# Altium PCB 2019电压基准.PcbDoc
Units mil, origin at the board's own origin, x right, y up, seen from the top; angles counter-clockwise.
Board outline 2866.22 x 2383.11 mil, 2 copper layers (Top Layer, Bottom Layer); 52 components, 32 nets, 189 pads, 6 vias.
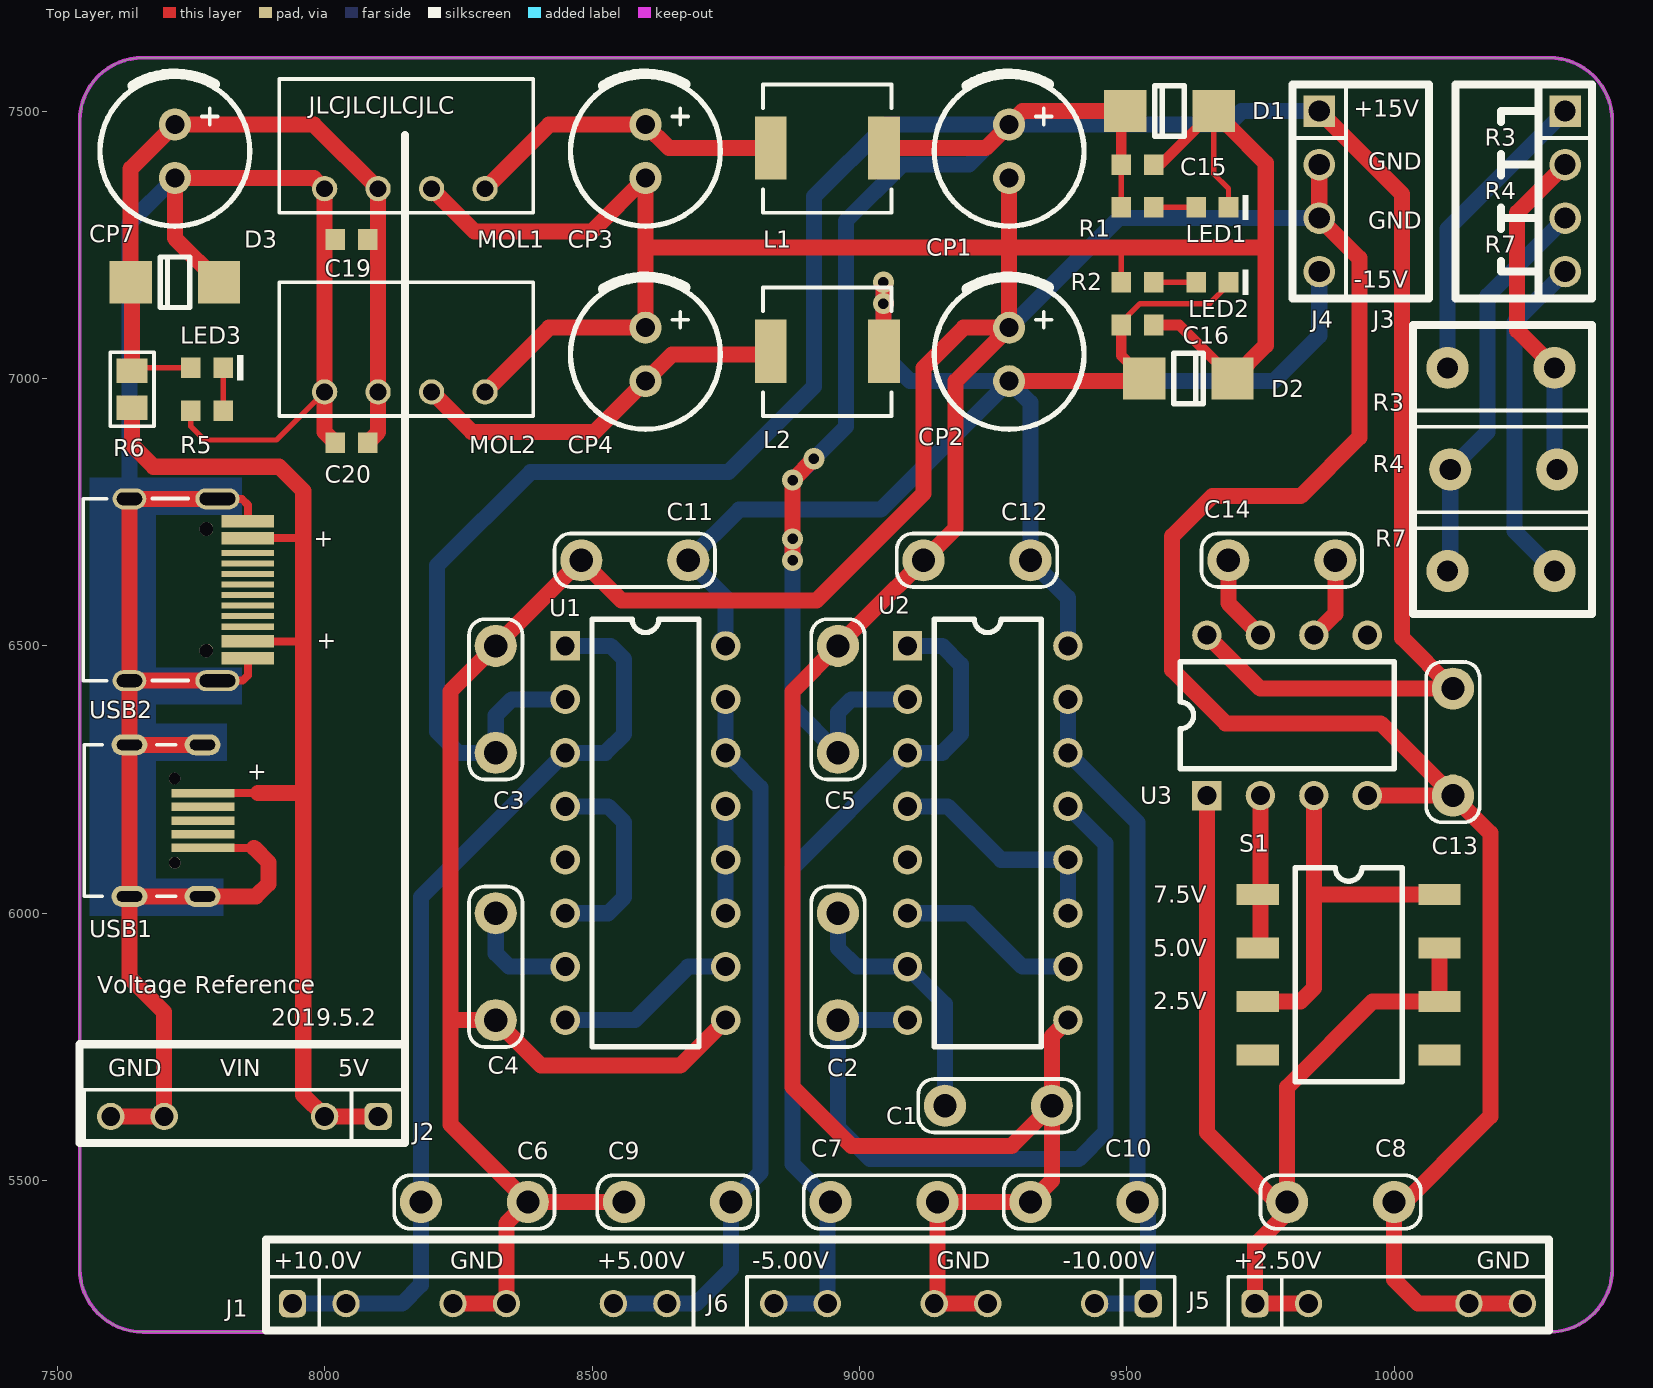
[diagram p0: Top Layer view]
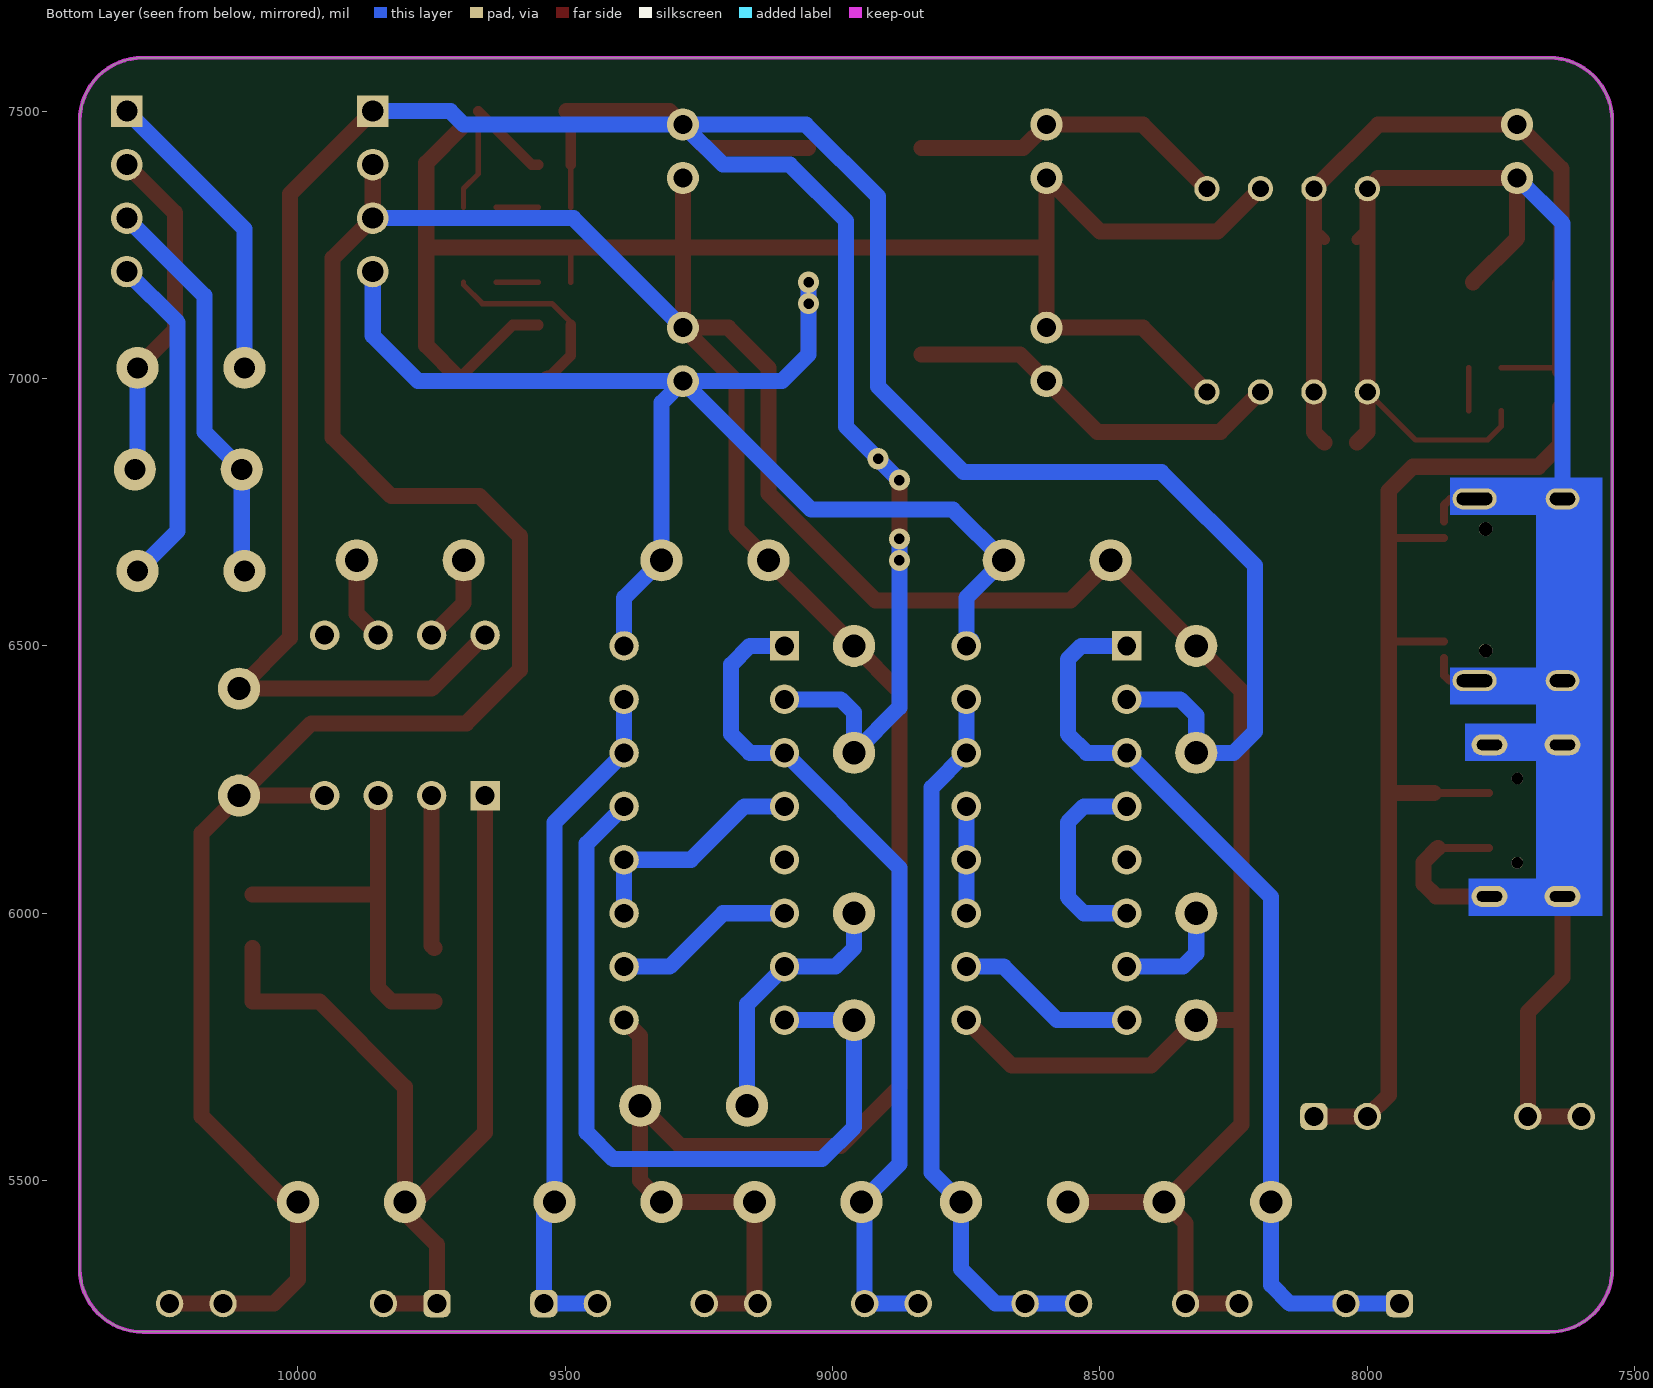
[diagram p1: Bottom Layer view, seen from below]
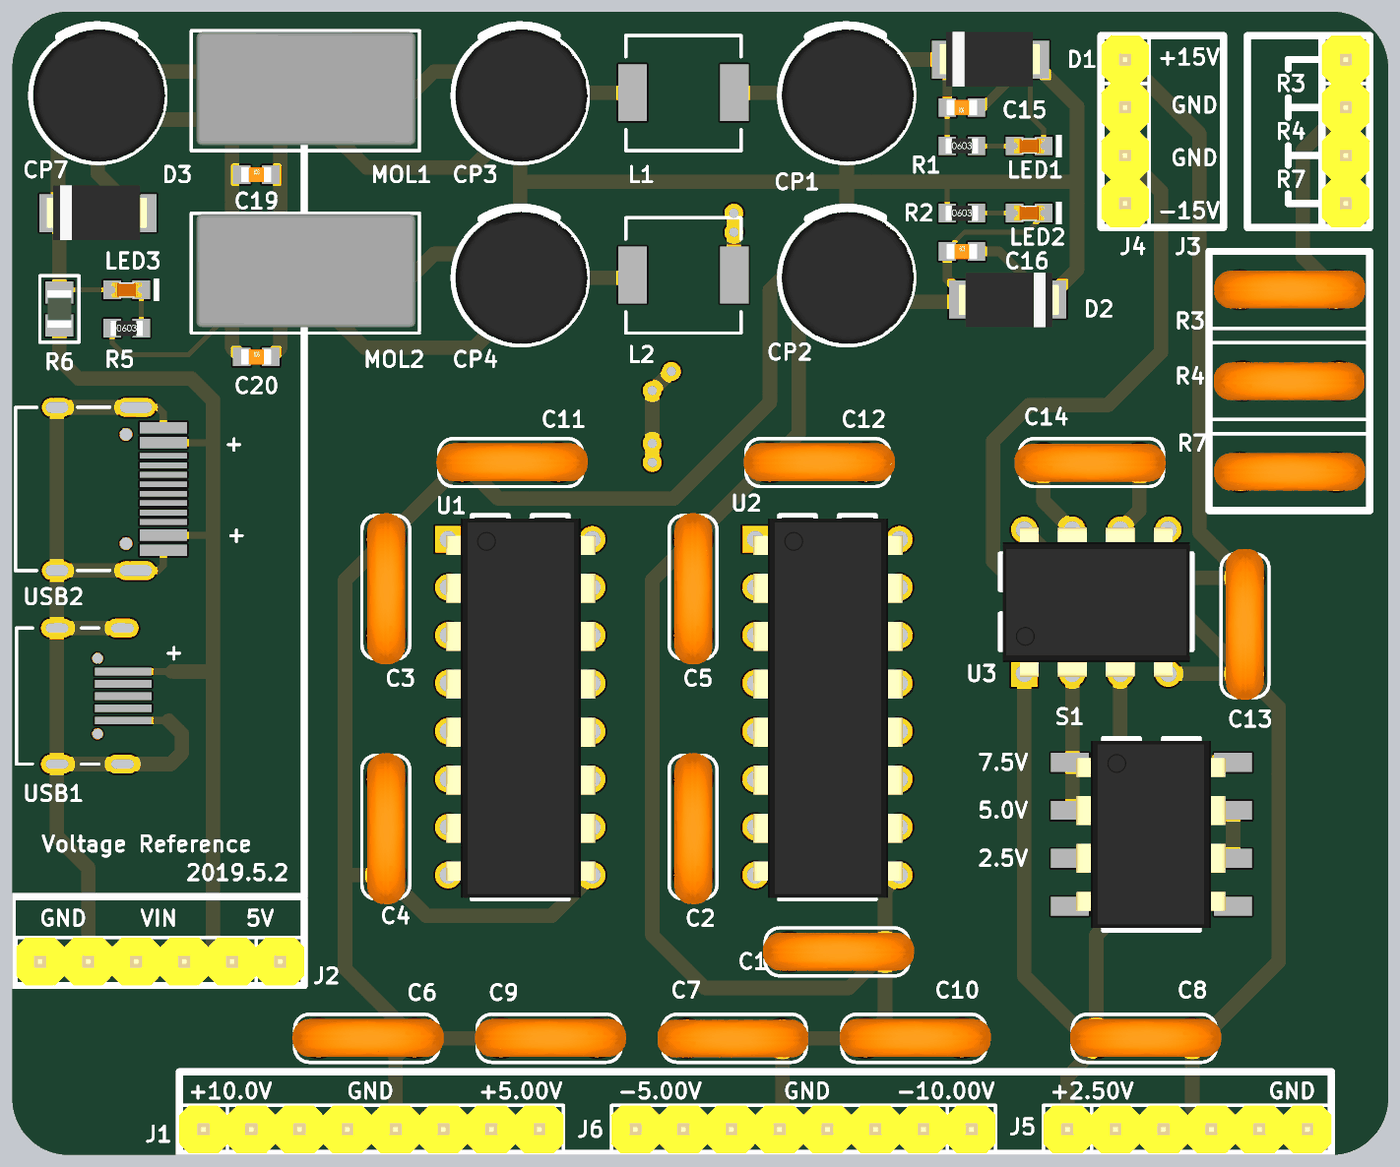
[diagram p2: 3D render of the assembled board from above, using the file's embedded part models]

## Layer stack, top to bottom
Top Layer: signal copper 1.4
Dielectric: dielectric 12.6, FR-4, Dk 4.8
Bottom Layer: signal copper 1.4

## Board outline
7541.89,5335 7541.89,7481.89 cw(c7660,7481.89) 7660,7600 10290,7600 cw(c10290,7481.89) 10408.11,7481.89 10408.11,5335 cw(c10290,5335) 10290,5216.89 7660,5216.89 cw(c7660,5335)

## Design rules (kind name [scope] priority, off if disabled: settings)
Clearance [All] p1: gap=7
ComponentClearance [All] p1 off: gap=10 collisioncheckmode=3 verticalgap=10 showdistances=FALSE
Height [All] p1 off: minheight=0 maxheight=1000 prefheight=500
HoleSize [All] p1: absolutevalues=TRUE maxlimit=196.85 minlimit=15.75 maxpercent=80.000 minpercent=20.000
MinimumSolderMaskSliver [All] p1 off: minsoldermaskwidth=10
PolygonConnect [All] p1: connectstyle=Relief reliefconductorwidth=10 reliefentries=4 polygonreliefangle="90 Angle"
RoutingVias [All] p1: holewidth=19.68 width=39.37 viastyle="Through Hole" minholewidth=19.68 minwidth=39.37 maxholewidth=19.68 maxwidth=39.37
SilkToSilkClearance [All] p1 off: silktosilkclearance=10
SilkscreenOverComponentPads [All] p1 off: minsilkscreentomaskgap=10
SolderMaskExpansion [All] p1: expansion=4
Width [All] p1: maxlimit=30 minlimit=10 preferedwidth=20
22 further rules are at their usual default settings.

## Components (designator, comment, footprint, x,y, rotation, side; value= is the part's Value field where it differs from the comment)
C1 "0.1UF" cap-3 9360,5640 r180 top
C2 "0.1UF" cap-3 8960,5800 r90 top
C3 "0.1UF" CAP-3 8320,6300 r90 top
C4 "0.1UF" CAP-3 8320,5800 r90 top
C5 "0.1UF" cap-3 8960,6300 r90 top
C6 "0.1UF" CAP-3 8380,5460 r180 top
C7 "0.1UF" CAP-3 8946,5460 r0 top
C8 "0.1UF" CAP-3 10000,5460 r180 top
C9 "0.1UF" CAP-3 8760,5460 r180 top
C10 "0.1UF" CAP-3 9520,5460 r180 top
C11 "0.1UF" CAP-3 8680,6660 r180 top
C12 "0.1UF" cap-3 9320,6660 r180 top
C13 "0.1UF" CAP-3 10110,6420 r270 top
C14 "0.1UF" cap-3 9690,6660 r0 top
C15 "0.1UF" LC-0603-C 9520,7400 r180 top
C16 "0.1UF" LC-0603-C 9520,7100 r0 top
C19 "0.1UF" LC-0603-C 8050,7260 r0 top
C20 "0.1UF" LC-0603-C 8050,6880 r0 top
CP1 "100UF/25V" cap 9280,7500 r270 top
CP2 "100UF/25V" cap 9280,7120 r270 top
CP3 "100UF/25V" cap 8600,7500 r270 top
CP4 "100UF/25V" cap 8600,7120 r270 top
CP7 "220UF/10V" cap 7720,7500 r270 top
D1 "16CA" LC-SMA(DO-214AC)_S3 9580,7500 r0 top
D2 "16CA" LC-SMA(DO-214AC)_S3 9615.43,7000 r180 top
D3 "6.8CA" LC-SMA(DO-214AC)_S3 7720,7180 r0 top
J1 "CON8" sip-8 7940,5270 r0 top
J2 "CON6" sip-6 8100,5620 r180 top
J3 "CON4" sip-4 10320,7500 r270 top
J4 "CON4" sip-4 9860,7500 r270 top
J5 "CON6" sip-6 9740,5270 r0 top
J6 "CON8" sip-8 9540,5270 r180 top
L1 "33UH" lin6*6 9060,7306 r180 top
L2 "33UH" lin6*6 9060,6926 r180 top
LED1 "LED" lc-0603_LED_S5 9660,7320 r180 top
LED2 "LED" lc-0603_LED_S5 9660,7180 r180 top
LED3 "LED" lc-0603_LED_S5 7780,7020 r180 top
MOL1 "B0505S" B0505S 8390,7560 r180 top
MOL2 "B0505S" B0505S 8390,7180 r180 top
R1 "10K" LC-0603-R 9520,7320 r0 top
R2 "10K" LC-0603-R 9520,7180 r0 top
R3 "10K" fuse4 10300,7020 r180 top
R4 "10K" fuse4 10105,6830 r0 top
R5 "2K" LC-0603-R 7780,6940 r0 top
R6 "0R" LC-0805_L 7640,6980 r90 top
R7 "10K" fuse4 10300,6640 r180 top
S1 "SW DIP-4" stc-dip8-smd 9765,6035 r0 top
U1 "AD588" stc-dip16 8450,6500 r0 top locked
U2 "AD588" stc-dip16 9090,6500 r0 top locked
U3 "AD584" stc-dip8 9650,6220 r90 top
USB1 "USB-Micro-A" USB-MICRO-R 7635,6315 r270 top locked
USB2 "USB-Type-C-A" USB-Type-C-R 7635,6775 r270 top locked

## Footprints (in the part's own frame and the unit in brackets; to place one, negate y for a bottom-side part, rotate by r counter-clockwise, add the part's x,y. Pads: shape width x height; smd on the part's side, far side on the other; paste and mask are expansions set on the pad)
B0505S [mm]
  round 1.2 hole 0.8: 1(9.906,5.207) 2(7.366,5.207) 3(4.826,5.207) 4(2.286,5.207)
  silkscreen extent 0,0 12.06,6.35, body extent 0.2,0.05 11.8,6.05, height 10.5
cap [mil]
  round 60 hole 35.43: 1(25,0) 2(125,0)
  silkscreen extent -70,-140 215,140, body extent -63,-135 213,141, height 531
cap-3 [mm]
  round 2 hole 1.1: 1(0,0) 2(5.08,0)
  silkscreen extent -1.27,-1.27 6.35,1.27, body extent -1.52,-1.02 6.45,0.98, height 11.46
CAP-3 [mm]
  round 2 hole 1.1: 1(0,0) 2(5.08,0)
  silkscreen extent -1.27,-1.27 6.35,1.27, body extent -1.52,-1.02 6.45,0.98, height 11.46
fuse4 [mm]
  round 2 hole 1: 1(0,0) 2(5.08,0)
  silkscreen extent -1.78,-2.03 6.73,2.03, body extent -1.52,-1.02 6.45,0.98, height 11.46
LC-0603-C [mm]
  rect 0.93x0.98 smd: 1(-0.77,0) 2(0.77,0)
  body extent -0.8,-0.4 0.8,0.4, height 0.3
LC-0603-R [mm]
  rect 0.93x0.98 smd: 1(-0.77,0) 2(0.77,0)
  body extent -0.85,-0.4 0.85,0.4, height 0.56
lc-0603_LED_S5 [mm]
  rect 0.93x0.98 smd: A(0.77,0) K(-0.77,0)
  silkscreen extent -1.72,-0.6 -1.42,0.6, body extent -0.8,-0.4 0.8,0.4, height 0.6
LC-0805_L [mm]
  rect 1.16x1.47 smd: 1(-0.875,0) 2(0.875,0)
  silkscreen extent -1.76,-1.04 1.76,1.03, body extent -1,-0.64 1,0.64, height 0.6
LC-SMA(DO-214AC)_S3 [mm]
  rect 2x2 smd: 1(2.1,0) 2(-2.1,0)
  silkscreen extent -0.7,-1.2 0.7,1.2, body extent -2.7,-1.43 2.58,1.46, height 2.44
lin6*6 [mm]
  rect 1.5x3 smd: 1(0.356,-3.175) 2(5.74,-3.175)
  silkscreen extent 0,-6.2 6.1,-0.1
sip-4 [mm]
  rect 1.5x1.5 hole 1: 1(0,0)
  round 1.5 hole 1: 2(2.54,0) 3(5.08,0) 4(7.62,0)
  silkscreen extent -1.27,-1.27 8.89,1.27, body extent -1.27,-1.27 8.89,1.27, height 6
sip-6 [mm]
  rrect50% 1.3x1.3 hole 0.9: 1(0,0)
  round 1.3 hole 0.9: 2(2.54,0) 5(10.16,0) 6(12.7,0)
  silkscreen extent -1.27,-1.27 13.97,1.27, body extent -1.27,-1.27 13.97,1.27, height 6
sip-8 [mm]
  rrect50% 1.3x1.3 hole 0.9: 1(0,0)
  round 1.3 hole 0.9: 2(2.54,0) 4(7.62,0) 5(10.16,0) 7(15.24,0) 8(17.78,0)
  silkscreen extent -1.27,-1.27 19.05,1.27, body extent -1.27,-1.27 19.05,1.27, height 6
stc-dip8 [mm]
  rect 1.4x1.4 hole 0.9: 1(0,0)
  round 1.4 hole 0.9: 2(0,-2.54) 3(0,-5.08) 4(0,-7.62) 5(7.62,-7.62) 6(7.62,-5.08) 7(7.62,-2.54) 8(7.62,0)
  silkscreen extent 1.27,-8.89 6.35,1.27, body extent -0.18,-8.77 7.74,1.14, height 4.19
stc-dip8-smd [mm]
  rect 2x1 smd: 1(-0.508,0) 2(-0.508,-2.54) 3(-0.508,-5.08) 4(-0.508,-7.62) 5(8.128,-7.62) 6(8.128,-5.08) 7(8.128,-2.54) 8(8.128,0)
  silkscreen extent 1.27,-8.89 6.35,1.27, body extent -0.18,-8.77 7.74,1.14, height 4.19
stc-dip16 [mm]
  rect 1.4x1.4 hole 0.9: 1(0,0)
  round 1.4 hole 0.9: 2(0,-2.54) 3(0,-5.08) 4(0,-7.62) 5(0,-10.16) 6(0,-12.7) 7(0,-15.24) 8(0,-17.78) 9(7.62,-17.78) 10(7.62,-15.24) 11(7.62,-12.7) 12(7.62,-10.16) 13(7.62,-7.62) 14(7.62,-5.08) 15(7.62,-2.54) 16(7.62,0)
  silkscreen extent 1.27,-19.05 6.35,1.27, body extent -0.12,-18.98 7.8,1.09, height 4.19
USB-MICRO-R [mm]
  oval 1x1.7 hole 0.5 slot 1.2 at 90 deg: 0(0,3.47) 0(0,0) 0(7.2,0) 0(7.2,3.47)
  rect 0.4x3 smd: 1(2.3,3.5) 2(2.95,3.5) 3(3.6,3.5) 4(4.25,3.5) 5(4.9,3.5)
  round 0.55 hole 0.55: G(1.6,2.15) G(5.6,2.15)
  silkscreen extent 0,-2.15 7.2,2.2
USB-Type-C-R [mm]
  oval 1x2.1 hole 0.6 slot 1.7 at 90 deg: 0(0,4.18) 0(8.64,4.18)
  oval 1x1.6 hole 0.6 slot 1.2 at 90 deg: 0(0,0) 0(8.64,0)
  rect 0.6x2.5 smd: A1(1.07,5.625) A4(1.87,5.625) A9(6.77,5.625) A12(7.57,5.625)
  rect 0.3x2.5 smd: A5(3.07,5.625) A6(4.07,5.625) A7(4.57,5.625) A8(5.57,5.625) B5(6.07,5.625) B6(5.07,5.625) B7(3.57,5.625) B8(2.57,5.625)
  round 0.65 hole 0.65: G(1.43,3.65) G(7.21,3.65)
  silkscreen extent -0.01,-2.2 8.64,2.79

## Part data
C1 C2 C3 C4 C5 C6 C7 C8 C9 C10 C11 C12 C13 C14 C15 C16 C19 C20: library part CAP
CP1 CP2 CP3 CP4 CP7: library part CAP1
D1 D2 D3: library part DIODE
J1 J2 J3 J4 J5 J6: "Connector"
L1 L2: library part INDUCTOR
R1 R2 R3 R4 R5 R6 R7: library part RES
S1: "DIP Switch"

## Via types
v1: diameter 39.37, hole 19.68, Top Layer to Bottom Layer, 6 vias

## Nets (pads, with @x,y where several pads share a name; then routed paths per layer and width w, separated by ;. In a path a pad name is that pad's centre, name@x,y a point inside that pad or via, vN(x,y) a via of type N, cw(c..) or ccw(c..) an arc to the next point about the centre after c; other vN are vias at no path point)
+15V: C3.1 C5.1 C13.1 C15.2 CP1.1 D1.2 J4.1 L1.1 R1.1 U1.2 U2.2 U3.8 | length 7045.2
  Top Layer w10: R1.1 C15.2 ; D1.2@9489.68,7485 9489.68,7492.36 D1.2
  Top Layer w20: C15.2 D1.2@9489.68,7485
  Top Layer w30: v1(8875,6660) v1(8875,6810) v1(8915,6850) ; L1.1 9210,7431 9236,7431 CP1.1 9305,7500 D1.2 ; U3.8 9750,6420 C13.1 10015,6515 10015,7005 10015,7345 J4.1
  Bottom Layer w30: U1.2 8350,6400 8320,6370 C3.1 8250,6300 8210,6340 8210,6650 8385,6825 8755,6825 8915,6985 8915,7340 9050,7475 CP1.1 ; v1@8875,6695 8875,6620 ; v1(8875,6700) 8875,6620 ; v1(8875,6810) 8975,6910 8975,7295 9080,7400 9205,7400 CP1.1 ; U2.2 8985,6400 8960,6375 C5.1 8875,6385 8875,6620 ; J4.1 9790,7500 9715,7500 9690,7475 9320,7475 CP1.1
-15V: C11.1 C12.1 C16.1 CP2.2 D2.1 J4.4 L2.1 LED2.K U1.16 U2.16 | length 3724.7
  Top Layer w10: C16.1 9489.68,7104.69 9525,7140 9655,7140 9690.31,7175.31 LED2.K
  Top Layer w20: C16.1 9489.68,7043.07 D2.1
  Top Layer w30: v1(9045,7180) v1(9045,7140) 9045,7052 L2.1 ; CP2.2 9527.76,6995 D2.1
  Bottom Layer w30: U1.16@8740,6510 U1.16 8750,6590 C11.1 8775,6755 8985,6755 ; 8835,6755 8985,6755 ; v1(9045,7180) v1(9045,7140) 9045,7045 9095,6995 CP2.2 ; U2.16 9390,6590 C12.1 9320,6955 CP2.2 ; 9655,6995 9430,6995 ; J4.4 9860,7080 9775,6995 9430,6995 ; 8985,6755 9040,6755 CP2.2 ; CP2.2 9430,6995
AGND: C1.1 C3.2 C4.1 C5.2 C6.1 C7.2 C8.1 C9.2 C10.2 C11.2 C12.2 C13.2 C15.1 C16.2 CP1.2 CP2.1 CP3.2 CP4.1 D1.1 D2.2 J1.4 J1.5 J4.2 J4.3 J5.5 J5.6 J6.4 J6.5 LED1.K MOL1.3 MOL2.4 R2.1 U1.9 U2.9 U3.4 | length 14223.2
  Top Layer w10: R2.1 9489.68,7244.69 ; D1.1 9662.68,7382.64 9690.31,7355 LED1.K
  Top Layer w20: C16.2 9598.11,7100 D2.2 ; C15.1 9562.68,7400 D1.1
  Top Layer w30: MOL1.3 8280,7275 8500,7275 CP3.2 8600,7245 ; J1.4 J1.5 8340,5420 C6.1 ; MOL2.4 8420,7095 CP4.1 8600,7245 ; C9.2 C6.1 ; U1.9 8665,5715 8405,5715 C4.1 8235,5800 ; C7.2@9146,5440 9146,5276 J6.5 J6.4 ; C7.2 C10.2 9360,5500 C1.1 ; CP1.2 9280,7245 ; C10.2@9320,5440 C10.2@9330,5450 ; U2.9 9360,5770 C1.1 ; D1.1@9690.31,7472.36 9760,7402.68 9760,7245 ; D2.2 9760,7061.89 9760,7245 ; J4.2 J4.3 9935,7225 9935,6890 9825,6780 9660,6780 9585,6705 9585,6455 9685,6355 9975,6355 C13.2@10100,6230 ; U3.4 C13.2@10090,6220 ; C13.2@10110,6240 C13.2@10100,6230 ; J5.6 J5.5 10045,5270 10000,5315 10000,5440 10180,5620 10180,6150 C13.2 ; 8235,5800 8235,6415 C3.2 C11.2 8555,6585 8920,6585 9120,6785 9120,7020 9195,7095 CP2.1 ; 8235,5800 8235,5605 C6.1 ; 8600,7245 9280,7245 ; CP2.1 9280,7245 ; CP2.1 9180,6995 9180,6720 C5.2 8875,6415 8875,5675 8985,5565 9285,5565 C1.1 ; 9280,7245 9760,7245 ; C13.2@10090,6220 C13.2 ; C13.2@10090,6220 C13.2@10100,6230 ; C13.2@10100,6230 C13.2
  Bottom Layer w30: CP2.1 9485,7300 J4.3
GND: C19.1 C20.1 CP7.2 D3.1 J2.5 J2.6 MOL1.1 MOL2.1 R5.1 USB1.0 USB1.5 USB2.0 USB2.A1 USB2.A12 | length 4367.7
  Top Layer w10: R5.1 7749.69,6935.31 7749.69,6910.31 7775,6885 7910,6885 MOL2.1
  Top Layer w15: USB1.5 7867.91,6122.09 ; USB2.0@7799.57,6434.84 7846.3,6434.84 7856.46,6445 USB2.A12 ; USB2.0@7799.57,6775 7845,6775 7856.46,6763.54 7856.46,6750 USB2.A1
  Top Layer w20: 8000,7279.69 C19.1
  Top Layer w30: J2.6 J2.5 7700,5815 7635,5880 USB1.0@7635,6031.54 ; USB1.0@7771.61,6315 USB1.0@7635,6315 ; USB2.0@7799.57,6434.84 USB2.0@7635,6434.84 ; USB2.0@7799.57,6775 7635,6775 USB2.0@7635,6434.84 ; D3.1 7720,7262.68 CP7.2 7980,7375 MOL1.1 MOL2.1 8000,6899.69 C20.1 ; 7867.91,6122.09 7895,6095 7895,6055 7871.54,6031.54 7771.61,6031.54 USB1.0@7635,6031.54 ; USB1.0@7635,6031.54 USB1.0@7635,6315 ; USB1.0@7635,6315 USB2.0@7635,6434.84
  Bottom Layer w30: USB2.0@7635,6775 7635,7290 CP7.2
NetC1_2: C1.2 C2.2 U2.7 | length 498.5
  Bottom Layer w30: C2.2 8960,5935 8995,5900 U2.7 9160,5830 C1.2
NetC2_1: C2.1 U2.8 U2.13 | length 1514.6
  Bottom Layer w30: U2.8 C2.1 8960,5600 9020,5540 9410,5540 9460,5590 9460,6130 U2.13
NetC4_2: C4.2 U1.7 | length 215.4
  Bottom Layer w30: C4.2 8320,5925 8345,5900 U1.7
NetC14_1: C14.1 U3.7 | length 164.9
  Top Layer w30: C14.1 9690,6580 U3.7
NetC14_2: C14.2 U3.6 | length 156.6
  Top Layer w30: U3.6 9890,6560 C14.2
NetCP3_1: CP3.1 L1.2 MOL1.4 | length 601.9
  Top Layer w30: MOL1.4 8420,7475 CP3.1 8644,7431 L1.2
NetCP4_2: CP4.2 L2.2 MOL2.3 | length 725.1
  Top Layer w30: MOL2.3 8275,6900 8505,6900 CP4.2 8650,7045 L2.2@8834,7045
NetJ3_1: J3.1 R3.2 | length 571.1
  Bottom Layer w30: R3.2 10100,7280 J3.1
NetJ3_2: J3.2 R3.1 R4.2 | length 638.3
  Top Layer w30: R3.1 10230,7090 10230,7310 J3.2
  Bottom Layer w30: R3.1 10300,6835 R4.2
NetJ3_3: J3.3 R4.1 R7.2 | length 751.1
  Bottom Layer w30: R7.2 10105,6645 R4.1 10175,6900 10175,7155 J3.3
NetJ3_4: J3.4 R7.1 | length 630.4
  Bottom Layer w30: R7.1 10225,6715 10225,7105 J3.4
NetLED1_A: LED1.A R1.2 | length 79.4
  Top Layer w10: R1.2 LED1.A
NetLED2_A: LED2.A R2.2 | length 79.4
  Top Layer w10: R2.2 LED2.A
NetLED3_K: LED3.K R5.2 | length 80
  Top Layer w10: R5.2 LED3.K
NetS1_1: S1.1 S1.2 U3.2 | length 287.1
  Top Layer w30: S1.2 9750,5940 U3.2
NetS1_3: S1.3 S1.8 U3.3 | length 710.4
  Top Layer w30: S1.3 9825,5835 9850,5860 9850,6035 ; U3.3 9850,6035 ; S1.8 9910,6035 9850,6035
NetU1_4: U1.4 U1.6 | length 384.9
  Bottom Layer w30: U1.6 8530,6000 8560,6030 8560,6170 8530,6200 U1.4
NetU1_8: U1.8 U1.10 | length 341.4
  Bottom Layer w30: U1.8 8580,5800 8680,5900 U1.10
NetU1_11: U1.11 U1.12 U1.13 | length 200
  Bottom Layer w30: U1.11 U1.12 U1.13
NetU2_4: U2.4 U2.11 U2.12 | length 441.4
  Bottom Layer w30: U2.4 9165,6200 9265,6100 U2.12 U2.11
NetU2_6: U2.6 U2.10 | length 341.4
  Bottom Layer w30: U2.6 9205,6000 9305,5900 U2.10
VCC: J2.1 J2.2 R6.1 USB1.1 USB2.A4 USB2.A9 | length 2081.8
  Top Layer w15: USB1.1 7875,6224.45 ; USB2.A9 7946.54,6508.46 ; USB2.A4 7948.62,6701.38
  Top Layer w30: R6.1 7640,6875 7680,6835 7915,6835 7960,6790 7960,6224.45 ; 7875,6224.45 7960,6224.45 ; J2.1 J2.2 7960,5660 7960,6224.45
VIN: C19.2 C20.2 CP7.1 D3.2 LED3.A MOL1.2 MOL2.2 R6.2 | length 1623.9
  Top Layer w10: R6.2 7645.55,7020 LED3.A
  Top Layer w20: C19.2 8100,7279.69 ; 8100,6899.69 MOL2.2
  Top Layer w30: R6.2 7640,7177.32 D3.2 7637.32,7392.32 CP7.1 7980,7475 MOL1.2 MOL2.2 8100,6899.69 C20.2
VOUT: C8.2 J5.1 J5.2 S1.6 S1.7 U3.1 | length 1823.3
  Top Layer w30: U3.1 9650,5590 C8.2@9800,5440 ; J5.2 J5.1 9740,5380 C8.2@9800,5440 ; S1.7 S1.6 9960,5835 9800,5675 C8.2@9800,5440
VR+5V: C9.1 J1.7 J1.8 U1.14 U1.15 | length 1355.8
  Bottom Layer w30: J1.7 J1.8 8695,5270 8760,5335 8760,5440 C9.1@8770,5450 ; U1.15 U1.14 8815,6235 8815,5515 C9.1
VR+10V: C6.2 J1.1 J1.2 U1.1 U1.3 | length 1746.2
  Bottom Layer w30: J1.1 J1.2 8145,5270 8180,5305 8180,5440 8180,5615 8180,6030 U1.3 8525,6300 8560,6335 8560,6475 8535,6500 U1.1
VR-5V: C7.1 J6.7 J6.8 U2.1 U2.3 | length 1605
  Bottom Layer w30: J6.8 J6.7 8940,5466 8875,5531 8875,6085 U2.3 9155,6300 9190,6335 9190,6465 9155,6500 U2.1
VR-10V: C10.1 J6.1 J6.2 U2.14 U2.15 | length 1312.1
  Bottom Layer w30: U2.15 U2.14 9520,6170 C10.1 ; J6.2 J6.1 9540,5440 C10.1 ; C10.1@9520,5440 C10.1
pads on no net: S1.4 S1.5 U1.5 U2.5 U3.5 USB1.2 USB1.3 USB1.4 USB1.G USB2.A5 USB2.A6 USB2.A7 USB2.A8 USB2.B5 USB2.B6 USB2.B7 USB2.B8 USB2.G

## Keep-outs
Keep-Out Layer:
  the board outline again, w7

## Other copper
Bottom Layer:
  rectangle net GND: 7560,5995 7685,6815
  rectangle net GND: 7685,6745 7845,6815
  rectangle net GND: 7685,6390 7845,6460
  rectangle net GND: 7657.05,6285 7817.05,6355
  rectangle net GND: 7650.43,5995 7810.43,6065

## Silkscreen, mask and mechanical layers (free items; w line width, h text height)
Top Overlay:
  lines w15: 8150,5755 7541.89,5755 7541.89,5570 8150,5570 8150,7455 ; 10200,7220 10200,7200 10270,7200 ; 10200,7280 10200,7300 ; 10200,7320 10200,7300 ; 10200,7380 10200,7400 ; 10200,7420 10200,7400 ; 10200,7480 10200,7500 10270,7500 ; 10270,7150 10270,7550 ; 10270,7300 10200,7300 ; 10270,7400 10200,7400 ; 7890,5220 7890,5390 10290,5390 10290,5220 7890,5220 ; 9810,7150 10065,7150 10065,7550 9810,7550 9810,7150 ; 10035,6560 10035,7100 10370,7100 10370,6560 10035,6560 ; 10115,7150 10115,7550 10370,7550 10370,7150 10115,7150
  text "JLCJLCJLCJLC" at 7970,7495 h32
  text "+15V" at 9925,7490 h32
  text "R3" at 10170,7435 h32
  text "GND" at 9951.66,7390 h32
  text "R4" at 10170,7335 h32
  text "GND" at 9951.66,7280 h32
  text "R7" at 10170,7235 h32
  text "-15V" at 9925,7170 h32
  text "+" at 7980,6685 h32
  text "+" at 7985,6495 h32
  text "+" at 7855,6250 h32
  text "7.5V" at 9550,6020 h32
  text "5.0V" at 9550,5920 h32
  text "Voltage Reference" at 7575,5850 h32
  text "2.5V" at 9550,5820 h32
  text "2019.5.2" at 7900,5790 h32
  text "GND" at 7595,5695 h32
  text "VIN" at 7805,5695 h32
  text "5V" at 8025,5695 h32
  text "+10.0V" at 7905,5335 h32
  text "GND" at 8235,5335 h32
  text "+5.00V" at 8510,5335 h32
  text "-5.00V" at 8800,5335 h32
  text "GND" at 9145,5335 h32
  text "-10.00V" at 9380,5335 h32
  text "+2.50V" at 9700,5335 h32
  text "GND" at 10155,5335 h32